# Altium PCB Shield_Due.PcbDoc (part 2 of 2)
Units mil, origin at the board's own origin, x right, y up, seen from the top; angles counter-clockwise.
Board outline 10516 x 7552 mil, 4 copper layers (Top Layer, Layer 1 (GND), Layer 2 (PWR), Bottom Layer), stack 71.556 mil thick; 97 components, 77 nets, 424 pads, 5 vias.
Unrouted connection lines stored in the file: 174.
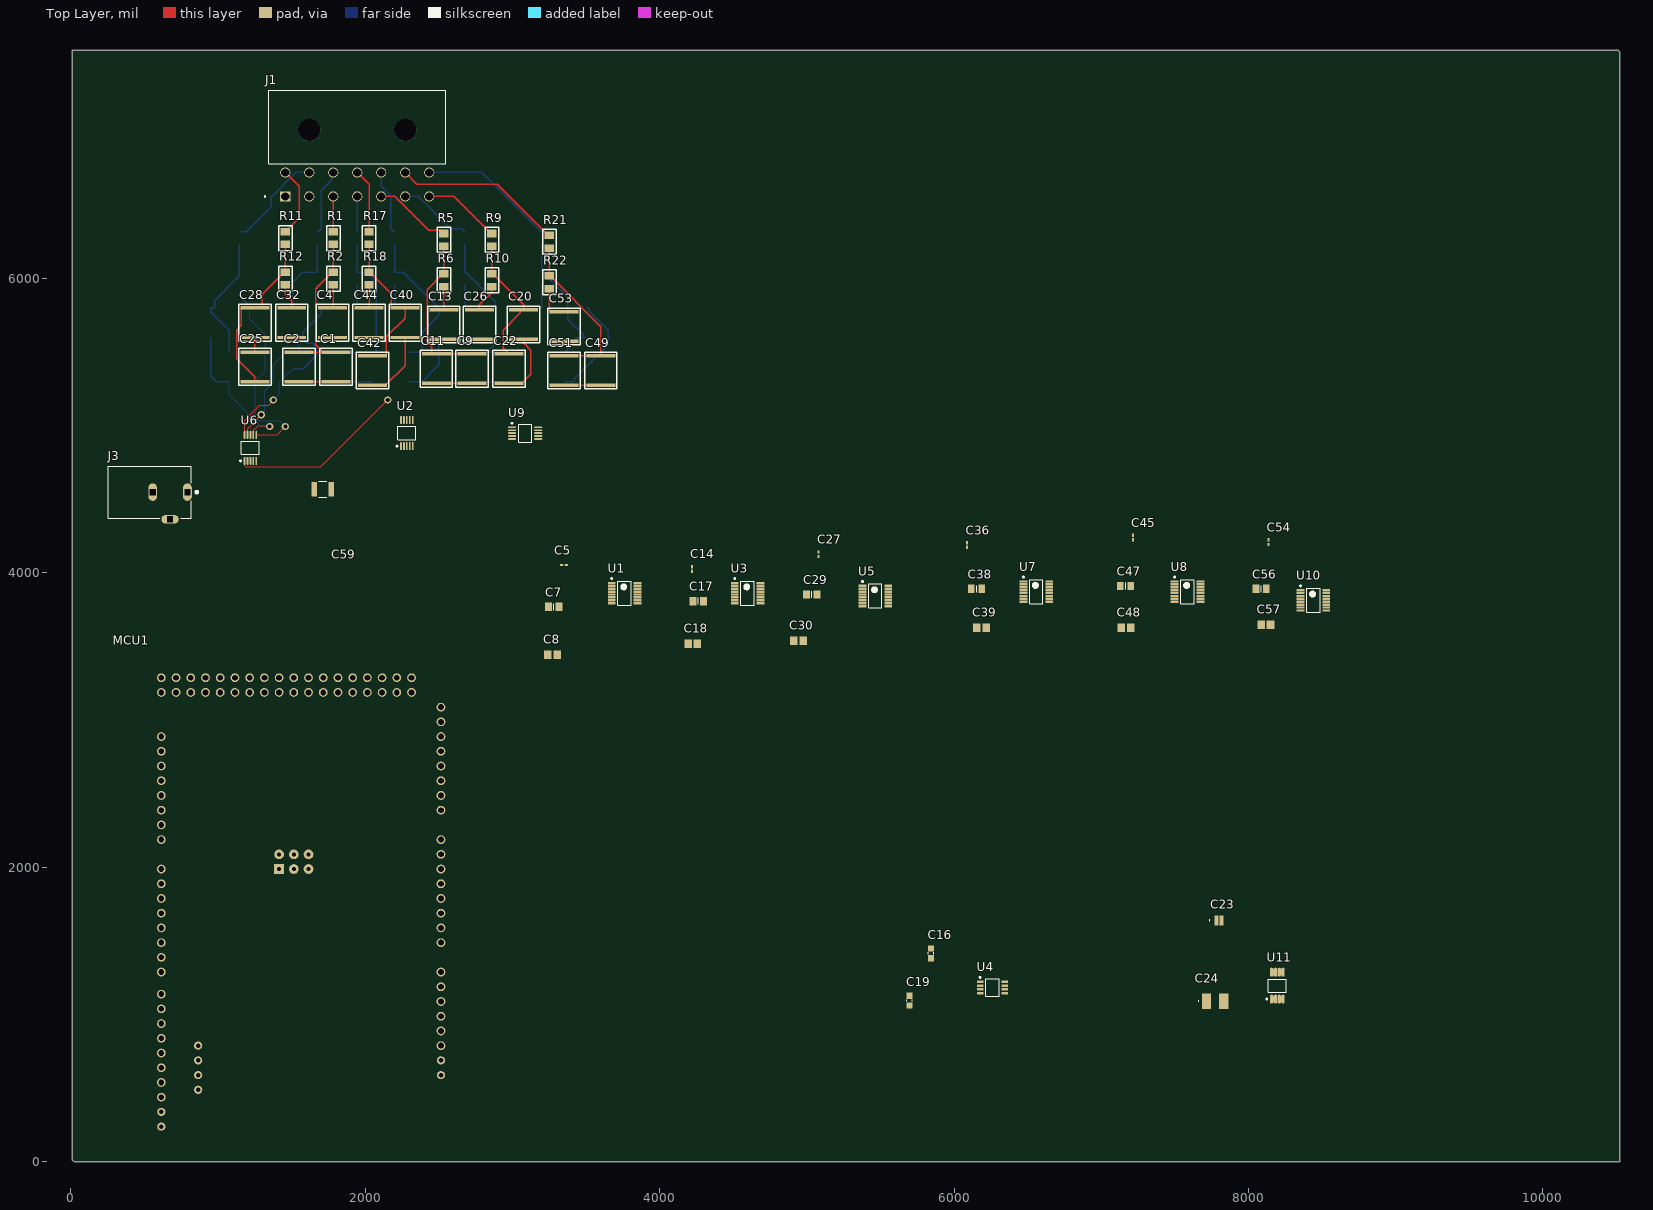
[diagram p0: Top Layer view]

## Via types
v1: diameter 50, hole 28, Top Layer to Bottom Layer, 5 vias

## Nets (pads, with @x,y where several pads share a name; then routed paths per layer and width w, separated by ;. In a path a pad name is that pad's centre, name@x,y a point inside that pad or via, vN(x,y) a via of type N, cw(c..) or ccw(c..) an arc to the next point about the centre after c; other vN are vias at no path point) (continued)
NetC12_1: (continued)
  Bottom Layer w10: R7.2 R8.1 2680.91,6043.31 2885,5839.21 2885,5560 2842.2,5517.2 2842.2,5507.2 2835.39,5500.39 2777.58,5500.39 C12.1 ; C12.1@2827.58,5500.39 C15.1@2950,5500.39
NetC12_2: C12.2 C15.2 U2.9 U3.4 | length 250
  Bottom Layer w10: C12.2@2700,5299.61 C15.2@2950,5299.61
NetC13_1: C13.1 R6.2 U2.6 | length 165.9
  Top Layer w10: C13.1 R6.2 ; C13.1@2603.6,5795.2 C13.1@2610.41,5788.39
NetC14_2: C14.2 U3.1
NetC16_+: C16.+ U4.2
NetC16_-: C16.- U4.4
NetC17_1: C17.1 U3.7
NetC20_1: C20.1 C22.1 R9.2 R10.1 | length 906.7
  Top Layer w10: R9.2 R10.1 2864.87,6031.3 3075,5821.17 C20.1 3060.86,5788.39 3054.05,5781.57 3054.05,5767.43 2935.5,5648.89 2935.5,5527.88 C22.1
NetC20_2: C20.2 C22.2 U5.4 U6.2 | length 433.6
  Top Layer w10: C22.2 3061.61,5287.6 3125,5350.98 3125,5512.99 3075,5562.99 C20.2
NetC21_1: C21.1 R8.2 U2.10 | length 158
  Bottom Layer w10: C21.1@2670.97,5800.39 2675,5804.43 R8.2
NetC25_1: C25.1 C28.1 R11.2 R12.1 | length 1200.5
  Top Layer w10: C25.1 1250,5331.57 1125,5456.57 1125,5650 1156.57,5681.57 1156.57,5793.58 1163.39,5800.39 C28.1 1293.19,5800.39 1300,5807.2 1300,5893.2 1450.1,6043.31 R12.1 R11.2
NetC25_2: C25.2 C28.2 U5.5 U6.4 | length 99.2
  Top Layer w10: C25.2 C28.2
NetC26_1: C26.1 R10.2 U6.1 | length 1385.7
  Top Layer w6: U6.1 1180.5,4760.64 1180.5,4731.93 1191.58,4720.86 1698.46,4720.86 v1(2152.6,5175)
  Top Layer w10: C26.1 2775,5821.17 2858.96,5905.13 R10.2
NetC27_2: C27.2 U5.1
NetC29_1: C29.1 U5.7
NetC31_1: C31.1 C33.1 R13.2 R14.1 | length 883
  Bottom Layer w10: C31.1 1075,5650 950,5775 C33.1 968.98,5800.39 975.79,5807.2 975.79,5850 1144.09,6018.31 R14.1 1144,6024.31 R13.2
NetC31_2: C31.2 C33.2 U6.7 U7.5 | length 1015.3
  Top Layer w6: U6.7 1239.56,4939.36 1239.56,4968.07 1271.49,5000 1345.28,5000 v1(1350,4995.28)
  Bottom Layer w6: C31.2 1075,5211.16 1290.89,4995.28 v1(1350,4995.28) v1@1346.83,4998.45
  Bottom Layer w10: C33.2 950,5337.99 988.39,5299.61 C31.2
NetC32_1: C32.1 R12.2 U6.5 | length 174.5
  Top Layer w10: R12.2 1456.01,5893.99 1500,5850 C32.1
NetC34_1: C34.1 C37.1 R15.2 R16.1 | length 606.3
  Bottom Layer w10: C37.1 1499.88,5800.39 1506.69,5807.2 1506.69,5975 1575,6043.31 R16.1 R15.2
NetC34_2: C34.2 C37.2 U6.9 U7.4 | length 946.1
  Top Layer w6: U6.9 1199.41,4981.22 v1(1293.19,5075)
  Bottom Layer w6: v1@1293.19,5078.64 1315.41,5100.86 1315.41,5237.61 1375,5297.2 1375,5412.01 C34.2@1463.39,5500.39
  Bottom Layer w10: v1(1293.19,5075) v1@1293.19,5078.64 ; C37.2 1541.6,5599.61 1548.41,5592.8 1548.41,5501.98 C34.2 C34.2@1463.39,5500.39
NetC35_1: C35.1 R14.2 U6.6 | length 1429.1
  Top Layer w6: U6.6 1400.31,4938.58 v1(1457,4995.28)
  Bottom Layer w6: C35.1@1215.91,5800.39 1215.91,5721.96 1320.24,5617.63 1320.24,5371.55 1253.19,5304.51 1253.19,5058.43 1276.62,5035 1333.16,5035 1333.43,5035.28 1417,5035.28 v1(1457,4995.28)
  Bottom Layer w10: R14.2 1150,5875 1200,5825 1200,5807.2 C35.1 C35.1@1215.91,5800.39
NetC36_2: C36.2 U7.1
NetC38_1: C38.1 U7.7
NetC40_1: C40.1 C42.1 R17.2 R18.1 | length 1054.6
  Top Layer w10: R17.2 R18.1 2030.91,6043.31 2177.54,5896.67 2177.54,5807.2 2184.35,5800.39 C40.1 2270.97,5731.06 2143.43,5603.51 2143.43,5482.2 2136.61,5475.39 C42.1
NetC40_2: C40.2 C42.2 U8.4 U9.2 | length 467.3
  Top Layer w10: C42.2 2136.61,5274.61 2270.97,5408.96 C40.2
NetC41_1: C41.1 R16.2 U6.10 | length 1432.4
  Top Layer w6: U6.10 1179.72,5035.99 1282.64,5138.91 1343,5138.91 1375,5170.91 v1(1375,5175)
  Bottom Layer w6: v1(1375,5175) 1414.01,5214.01 1414.01,5295.06 1507.58,5388.63
  Bottom Layer w10: 1507.58,5388.63 1577.24,5388.63 1670.81,5482.2 1670.81,5532.19 1643,5560 1605,5560 1575,5590 1575,5636.57 1700,5761.57 C41.1 1681.81,5800.39 1675,5807.2 R16.2
NetC43_1: C43.1 C46.1 R19.2 R20.1 | length 1026.9
  Bottom Layer w10: R19.2 R20.1 2257.09,6043.31 2479.05,5821.35 2479.05,5807.2 2485.86,5800.39 C43.1 2500,5750 2386.57,5636.57 2386.57,5507.2 2379.76,5500.39 C46.1
NetC43_2: C43.2 C46.2 U8.5 U9.4 | length 433.6
  Bottom Layer w10: C46.2 2386.61,5299.61 2500,5412.99 C43.2
NetC44_1: C44.1 R18.2 U9.1 | length 156.3
  Top Layer w10: C44.1 R18.2
NetC45_2: C45.2 U8.1
NetC47_1: C47.1 U8.7
NetC49_1: C49.1 C51.1 R21.2 R22.1 | length 1129.7
  Top Layer w10: R21.2 R22.1 3255.91,6018.31 3600,5674.21 C49.1 C51.1
NetC49_2: C49.2 C51.2 U9.7 U10.5 | length 250
  Top Layer w10: C51.2 C49.2
NetC50_1: C50.1 R20.2 U9.5 | length 202.3
  Bottom Layer w10: R20.2 2200,5807.2 2206.81,5800.39 C50.1
NetC52_1: C52.1 C55.1 U9.9 U10.4 | length 732.8
  Bottom Layer w10: C52.1 3413.75,5299.61 3420.56,5306.42 3420.56,5320.56 3650,5550 3650,5650.39 3520.95,5779.44 3520.95,5793.58 3514.14,5800.39 C55.1
NetC52_2: C52.2 C55.2 R23.2 R24.1 | length 961.6
  Bottom Layer w10: R23.2 R24.1 3205.91,6043.31 3375,5874.21 3375,5724.61 3479.05,5620.56 3479.05,5606.42 C55.2@3485.86,5599.61 ; C52.2 3365.17,5500.39 3371.98,5507.2 3371.98,5521.35 3429.28,5578.65 3429.28,5592.8 3436.09,5599.61 C55.2@3485.86,5599.61 ; C55.2 C55.2@3485.86,5599.61
NetC53_1: C53.1 R22.2 U9.6 | length 248.5
  Top Layer w10: R22.2 3250,5788.78 3263.39,5775.39 C53.1
NetC54_2: C54.2 U10.1
NetC56_1: C56.1 U10.7
NetC58_1: C58.1 R24.2 U9.10 | length 156.3
  Bottom Layer w10: C58.1 R24.2
NetJ1_3: J1.3 R1.1 | length 239.7
  Top Layer w10: R1.1 J1.3
NetJ1_4: J1.4 R3.1 | length 239.7
  Bottom Layer w10: R3.1 J1.4
NetJ1_5: J1.5 R5.1 | length 529.3
  Top Layer w10: J1.5 2199.63,6558.03 2430.77,6326.89 2512.39,6326.89 R5.1
NetJ1_6: J1.6 R7.1 | length 503.3
  Bottom Layer w10: J1.6 2358.14,6558.03 2577.27,6338.9 2654.41,6338.9 R7.1
NetJ1_7: J1.7 R9.1 | length 529.3
  Top Layer w10: J1.7 2601.32,6558.03 2853.06,6306.3 R9.1
NetJ1_8: J1.8 R11.1 | length 484
  Top Layer w10: R11.1 1461.91,6318.31 1482.5,6338.9 1482.5,6344.8 1550,6412.3 1550,6627.03 J1.8
NetJ1_9: J1.9 R13.1 | length 679.5
  Bottom Layer w10: R13.1 1190.5,6318.31 1359.69,6487.5 1359.69,6551.83 1528.89,6721.02 J1.9
NetJ1_10: J1.10 R15.1 | length 449.6
  Bottom Layer w10: R15.1 1679.41,6318.31 1700,6338.9 1700,6600 1771.57,6671.57 1771.57,6710.61 J1.10
NetJ1_11: J1.11 R17.1 | length 435.9
  Top Layer w10: J1.11 2025,6641.01 R17.1
NetJ1_12: J1.12 R19.1 | length 444.3
  Bottom Layer w10: J1.12 2107.98,6627.96 2173.5,6562.44 2173.5,6338.9 2194.09,6318.31 R19.1
NetJ1_13: J1.13 R21.1 | length 1156.2
  Top Layer w10: J1.13 2350.98,6641.01 2896.39,6641.01 3244.09,6293.31 R21.1
NetJ1_14: J1.14 R23.1 | length 932.8
  Bottom Layer w10: J1.14 2791.38,6721.02 3194.09,6318.31 R23.1
NetMCU1_2: MCU1.2 U10.11
NetMCU1_3: MCU1.3 U1.9 U3.9 U5.9 U7.9 U8.9 U10.9
NetMCU1_SCL: MCU1.SCL U1.13 U3.13 U5.13 U7.13 U8.13 U10.13
NetMCU1_SDA: MCU1.SDA U10.14
NetU1_14: U1.14 U3.12
NetU3_14: U3.14 U5.12
NetU5_14: U5.14 U7.12
NetU7_14: U7.14 U8.12
NetU8_14: U8.14 U10.12
pads on no net: J1. MCU1.4 MCU1.5 MCU1.5V_A MCU1.5V_B MCU1.5V_ICSP MCU1.6 MCU1.7 MCU1.8 MCU1.9 MCU1.10 MCU1.11 MCU1.12 MCU1.13 MCU1.22 MCU1.23 MCU1.24 MCU1.25 MCU1.26 MCU1.27 MCU1.28 MCU1.29 MCU1.30 MCU1.31 MCU1.32 MCU1.33 MCU1.34 MCU1.35 MCU1.36 MCU1.37 MCU1.38 MCU1.39 MCU1.40 MCU1.41 MCU1.42 MCU1.43 MCU1.44 MCU1.45 MCU1.46 MCU1.47 MCU1.48 MCU1.49 MCU1.50 MCU1.51 MCU1.52 MCU1.53 MCU1.A0 MCU1.A1 MCU1.A2 MCU1.A3 MCU1.A4 MCU1.A5 MCU1.A6 MCU1.A7 MCU1.A8 MCU1.A9 MCU1.A10 MCU1.A11 MCU1.AREF MCU1.AREF1 MCU1.CANRX MCU1.CANTX MCU1.DAC0 MCU1.DAC1 MCU1.GND1 MCU1.GND_A MCU1.GND_B MCU1.GND_DEBUG MCU1.GND_ICSP MCU1.IOREF MCU1.MISO_ICSP MCU1.MOSI_ICSP MCU1.NC MCU1.RESET MCU1.RESET_DEBUG MCU1.RESET_ICSP MCU1.RX0 MCU1.RX1 MCU1.RX2 MCU1.RX3 MCU1.SCK_ICSP MCU1.SCL1 MCU1.SDA1 MCU1.SWCLK_DEBUG MCU1.SWDIO_DEBUG MCU1.TX0 MCU1.TX1 MCU1.TX2 MCU1.TX3 MCU1.VIN U1.11 U3.11 U4.1 U4.7 U5.11 U7.11 U8.11

## Polygon pours and split planes (outlines as drawn)
no net on Layer 1 (GND) (split plane): 10503.9,7530.68 10503.9,20.1 29.32,20.1 28.1,21.32 28.1,7531.9 10502.68,7531.9
no net on Layer 2 (PWR) (split plane): 10503.9,7530.68 10503.9,20.1 29.32,20.1 28.1,21.32 28.1,7531.9 10502.68,7531.9

## Text inside footprints (layer, text, board x,y; h text height)
MCU1: Mechanical 7 "Rst" at 2589,763 h77.5; Mechanical 7 "3v3" at 2589,863 h77.5; Mechanical 7 "5v" at 2589,963 h77.5; Mechanical 7 "Gnd" at 2589,1063 h77.5; Mechanical 7 "Gnd" at 2589,1163 h77.5; Mechanical 7 "Vin" at 2589,1263 h77.5; Mechanical 7 "A0" at 2589,1463 h77.5; Mechanical 7 "A1" at 2589,1563 h77.5; Mechanical 7 "A2" at 2589,1663 h77.5; Mechanical 7 "A3" at 2589,1763 h77.5; Mechanical 7 "A4" at 2589,1863 h77.5; Mechanical 7 "A5" at 2589,1963 h77.5; Mechanical 7 "A6" at 2589,2063 h77.5; Mechanical 7 "A7" at 2589,2163 h77.5; Mechanical 7 "A8" at 2589,2363 h77.5; Mechanical 7 "A9" at 2589,2463 h77.5; Mechanical 7 "A10" at 2589,2563 h77.5; Mechanical 7 "A11" at 2589,2663 h77.5; Mechanical 7 "DAC0" at 2589,2763 h77.5; Mechanical 7 "DAC1" at 2589,2863 h77.5; Mechanical 7 "cnRX" at 2589,2963 h77.5; Mechanical 7 "cnTX" at 2589,3063 h77.5; Mechanical 7 "Aref" at 539,463 h77.5 r180; Mechanical 7 "Gnd" at 539,563 h77.5 r180; Mechanical 7 "13" at 539,663 h77.5 r180; Mechanical 7 "12" at 539,763 h77.5 r180; Mechanical 7 "11" at 539,863 h77.5 r180; Mechanical 7 "10" at 539,963 h77.5 r180; Mechanical 7 "9" at 539,1063 h77.5 r180; Mechanical 7 "8" at 539,1163 h77.5 r180; Mechanical 7 "7" at 539,1313 h77.5 r180; Mechanical 7 "6" at 539,1413 h77.5 r180; Mechanical 7 "5" at 539,1513 h77.5 r180; Mechanical 7 "4" at 539,1613 h77.5 r180; Mechanical 7 "3" at 539,1713 h77.5 r180; Mechanical 7 "2" at 539,1813 h77.5 r180; Mechanical 7 "Tx0" at 539,1913 h77.5 r180; Mechanical 7 "Rx0" at 539,2013 h77.5 r180; Mechanical 7 "Tx3(14)" at 539,2213 h77.5 r180; Mechanical 7 "Rx3(15)" at 539,2313 h77.5 r180; Mechanical 7 "Tx2(16)" at 539,2413 h77.5 r180; Mechanical 7 "Rx2(17)" at 539,2513 h77.5 r180; Mechanical 7 "Tx1(18)" at 539,2613 h77.5 r180; Mechanical 7 "Rx1(19)" at 539,2713 h77.5 r180; Mechanical 7 "SCL(21)" at 539,2913 h77.5 r180; Mechanical 7 "SDA(20)" at 539,2813 h77.5 r180; Mechanical 7 "5v" at 589,3113 h77.5 r270; Mechanical 7 "22" at 689,3113 h77.5 r270; Mechanical 7 "24" at 789,3113 h77.5 r270; Mechanical 7 "26" at 889,3113 h77.5 r270; Mechanical 7 "28" at 989,3113 h77.5 r270; Mechanical 7 "30" at 1089,3113 h77.5 r270; Mechanical 7 "32" at 1189,3113 h77.5 r270; Mechanical 7 "34" at 1289,3113 h77.5 r270; Mechanical 7 "36" at 1389,3113 h77.5 r270; Mechanical 7 "38" at 1489,3113 h77.5 r270; Mechanical 7 "40" at 1589,3113 h77.5 r270; Mechanical 7 "42" at 1689,3113 h77.5 r270; Mechanical 7 "44" at 1789,3113 h77.5 r270; Mechanical 7 "46" at 1889,3113 h77.5 r270; Mechanical 7 "48" at 1989,3113 h77.5 r270; Mechanical 7 "50" at 2089,3113 h77.5 r270; Mechanical 7 "52" at 2189,3113 h77.5 r270; Mechanical 7 "Gnd" at 2289,3113 h77.5 r270; Mechanical 7 "5v" at 639,3363 h77.5 r90; Mechanical 7 "23" at 739,3363 h77.5 r90; Mechanical 7 "25" at 839,3363 h77.5 r90; Mechanical 7 "27" at 939,3363 h77.5 r90; Mechanical 7 "29" at 1039,3363 h77.5 r90; Mechanical 7 "31" at 1139,3363 h77.5 r90; Mechanical 7 "33" at 1239,3363 h77.5 r90; Mechanical 7 "35" at 1339,3363 h77.5 r90; Mechanical 7 "37" at 1439,3363 h77.5 r90; Mechanical 7 "39" at 1539,3363 h77.5 r90; Mechanical 7 "41" at 1639,3363 h77.5 r90; Mechanical 7 "43" at 1739,3363 h77.5 r90; Mechanical 7 "45" at 1839,3363 h77.5 r90; Mechanical 7 "47" at 1939,3363 h77.5 r90; Mechanical 7 "49" at 2039,3363 h77.5 r90; Mechanical 7 "51" at 2139,3363 h77.5 r90; Mechanical 7 "53" at 2239,3363 h77.5 r90; Mechanical 7 "Gnd" at 2339,3363 h77.5 r90; Mechanical 7 "IOref" at 2589,663 h77.5; Mechanical 7 "SDA1" at 539,363 h77.5 r180; Mechanical 7 "SCL1" at 539,263 h77.5 r180; Mechanical 7 "MISO" at 1389,1913 h77.5 r270; Mechanical 7 "SCK" at 1489,1913 h77.5 r270; Mechanical 7 "MOSI" at 1539,2163 h77.5 r90; Mechanical 7 "RESET" at 1589,1913 h77.5 r270; Mechanical 7 "5V" at 1439,2163 h77.5 r90; Mechanical 7 "GND" at 1639,2163 h77.5 r90; Mechanical 7 "GND" at 939,763 h77.5; Mechanical 7 "SWCLK" at 939,663 h77.5; Mechanical 7 "SWDIO" at 939,563 h77.5; Mechanical 7 "RESET" at 939,463 h77.5